# Altium PCB PCB1.PcbDoc
Units mm, origin at the board's own origin, x right, y up, seen from the top; angles counter-clockwise.
Board outline 58 x 58 mm, 2 copper layers (Top Layer, Bottom Layer); 14 components, 9 nets, 30 pads, 0 vias.
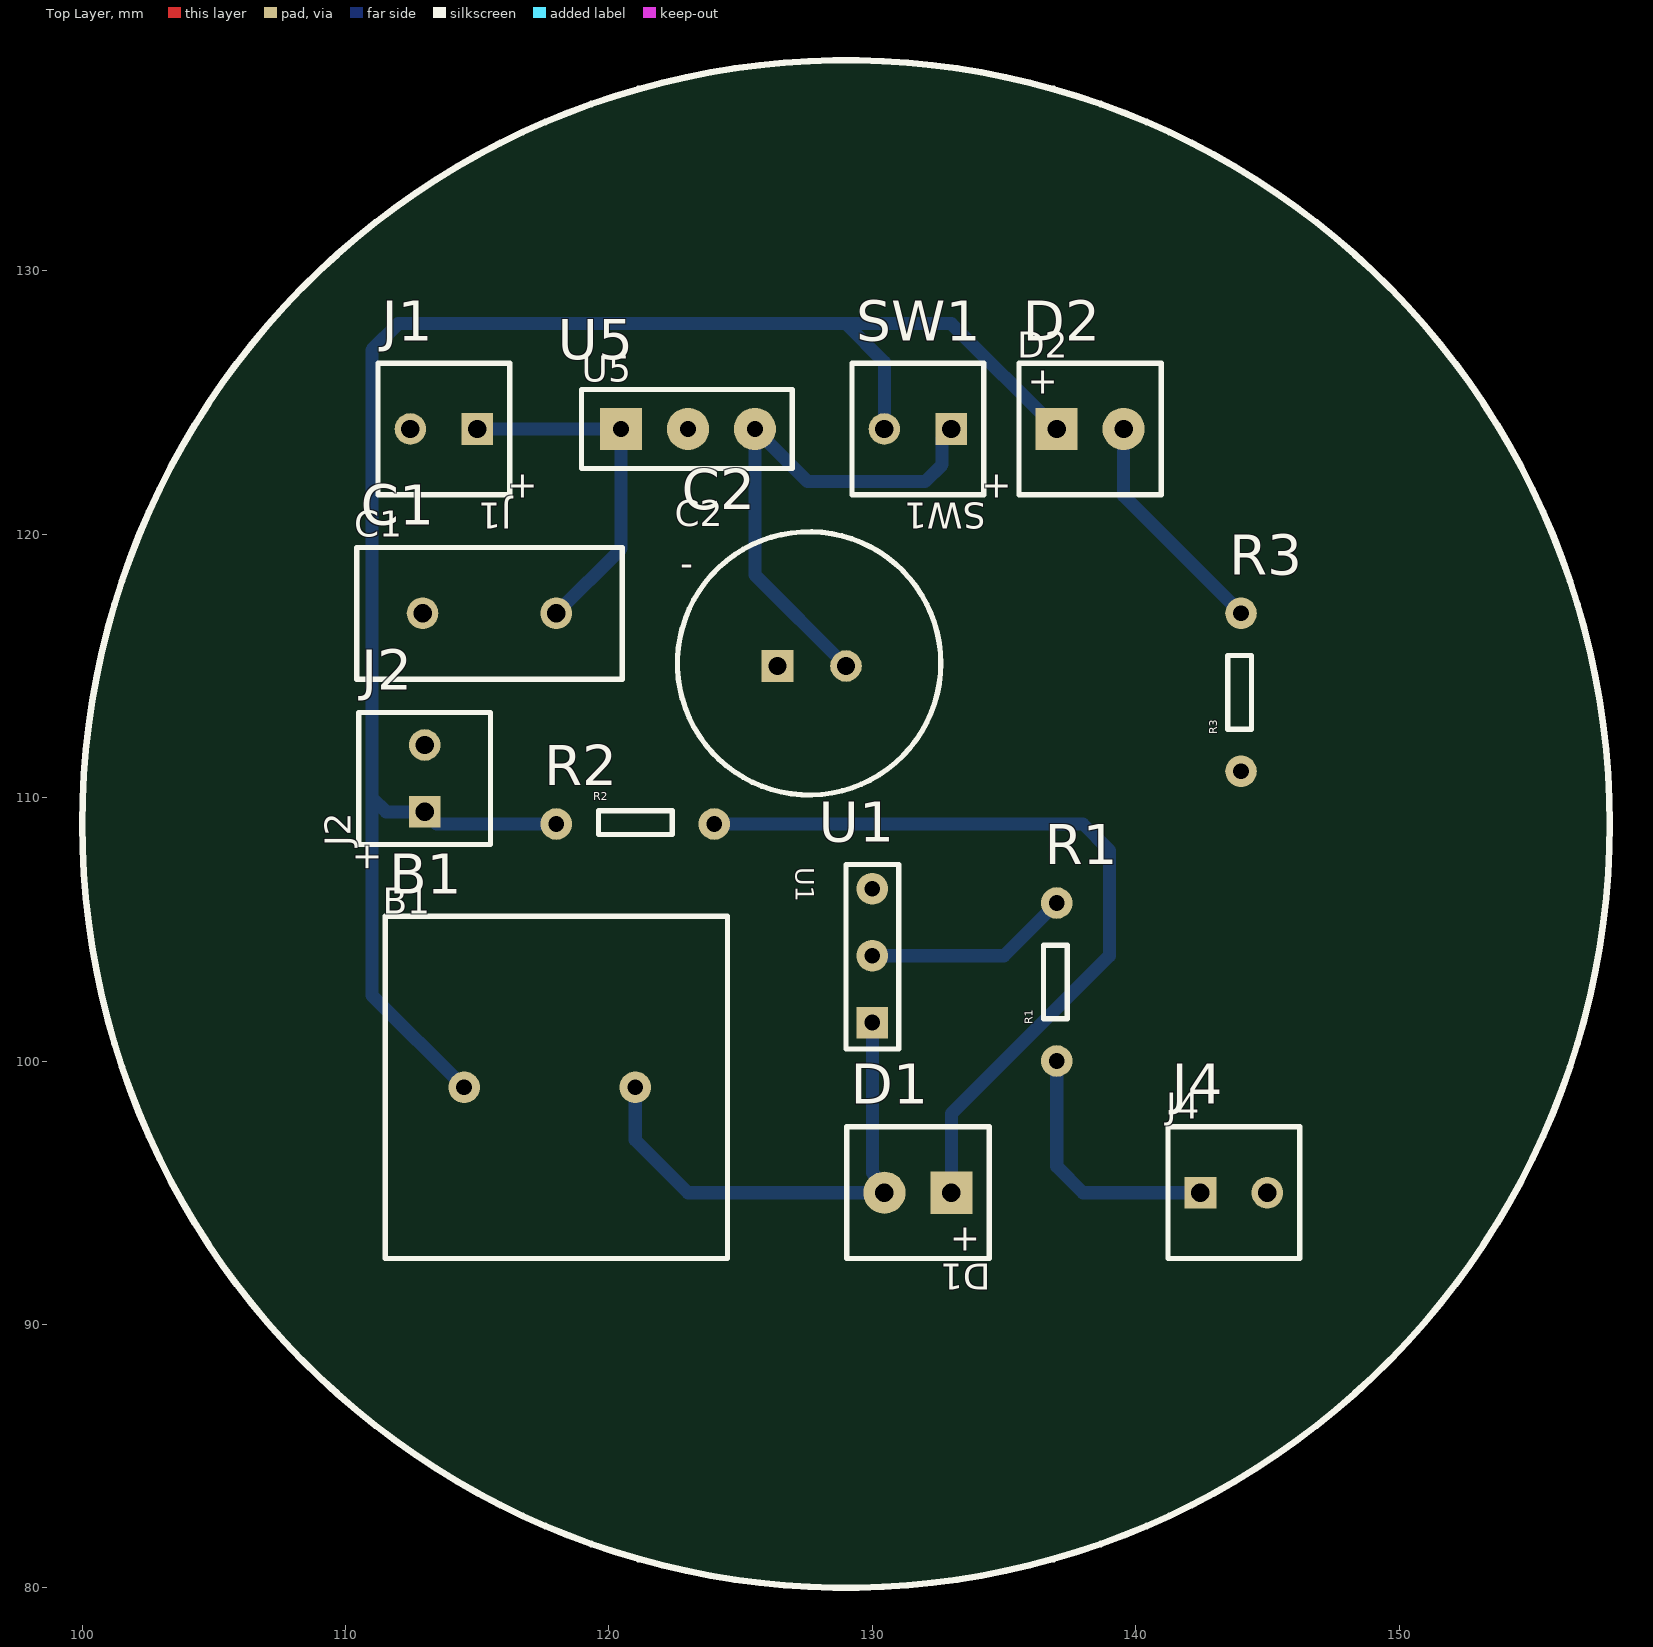
[diagram p0: Top Layer view]
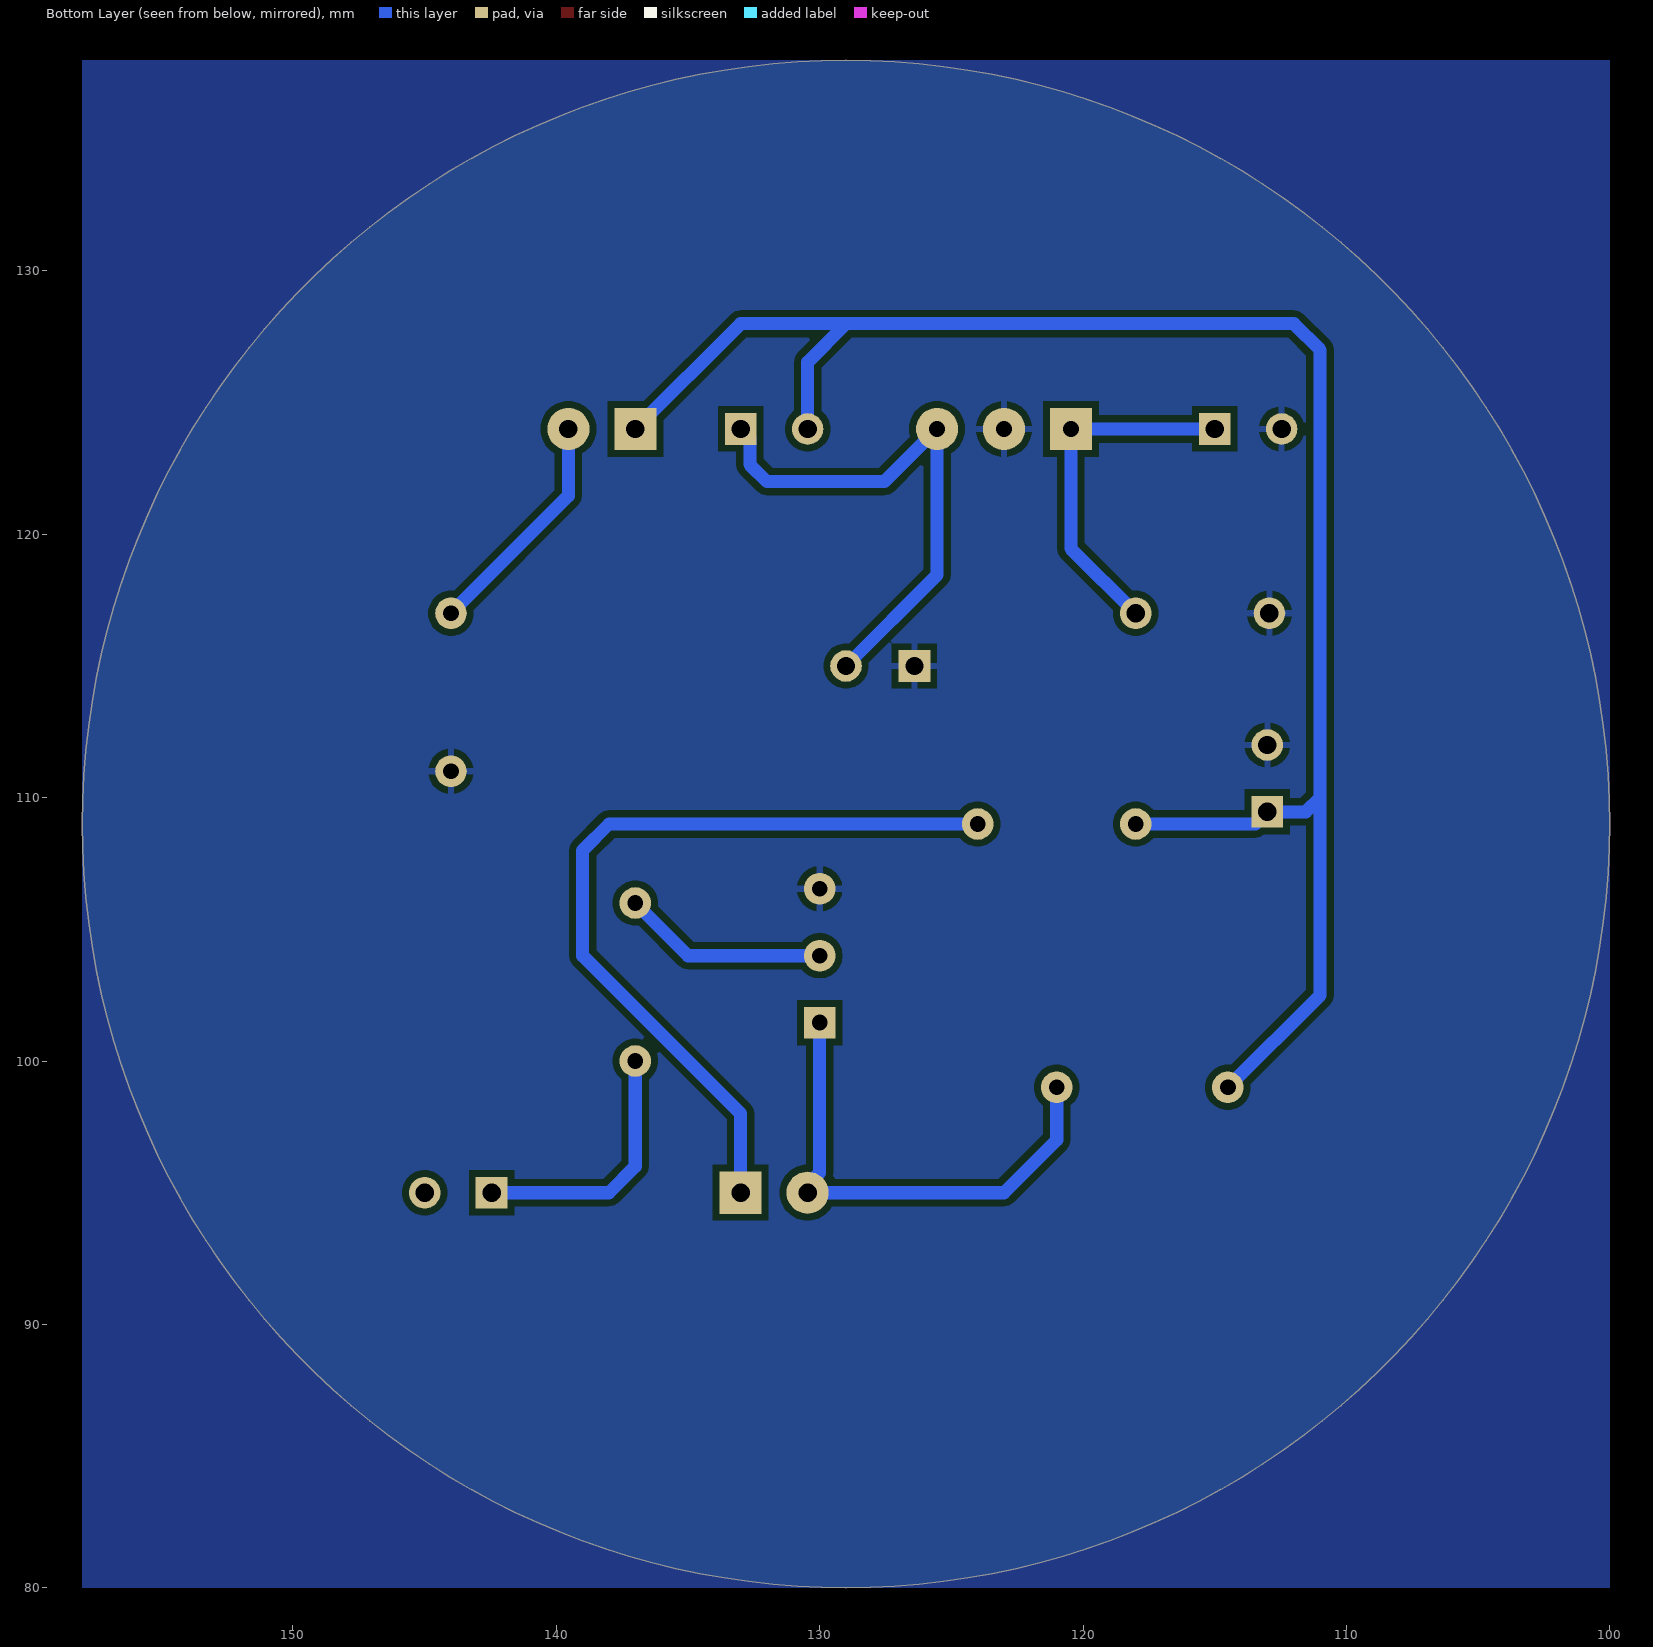
[diagram p1: Bottom Layer view, seen from below]
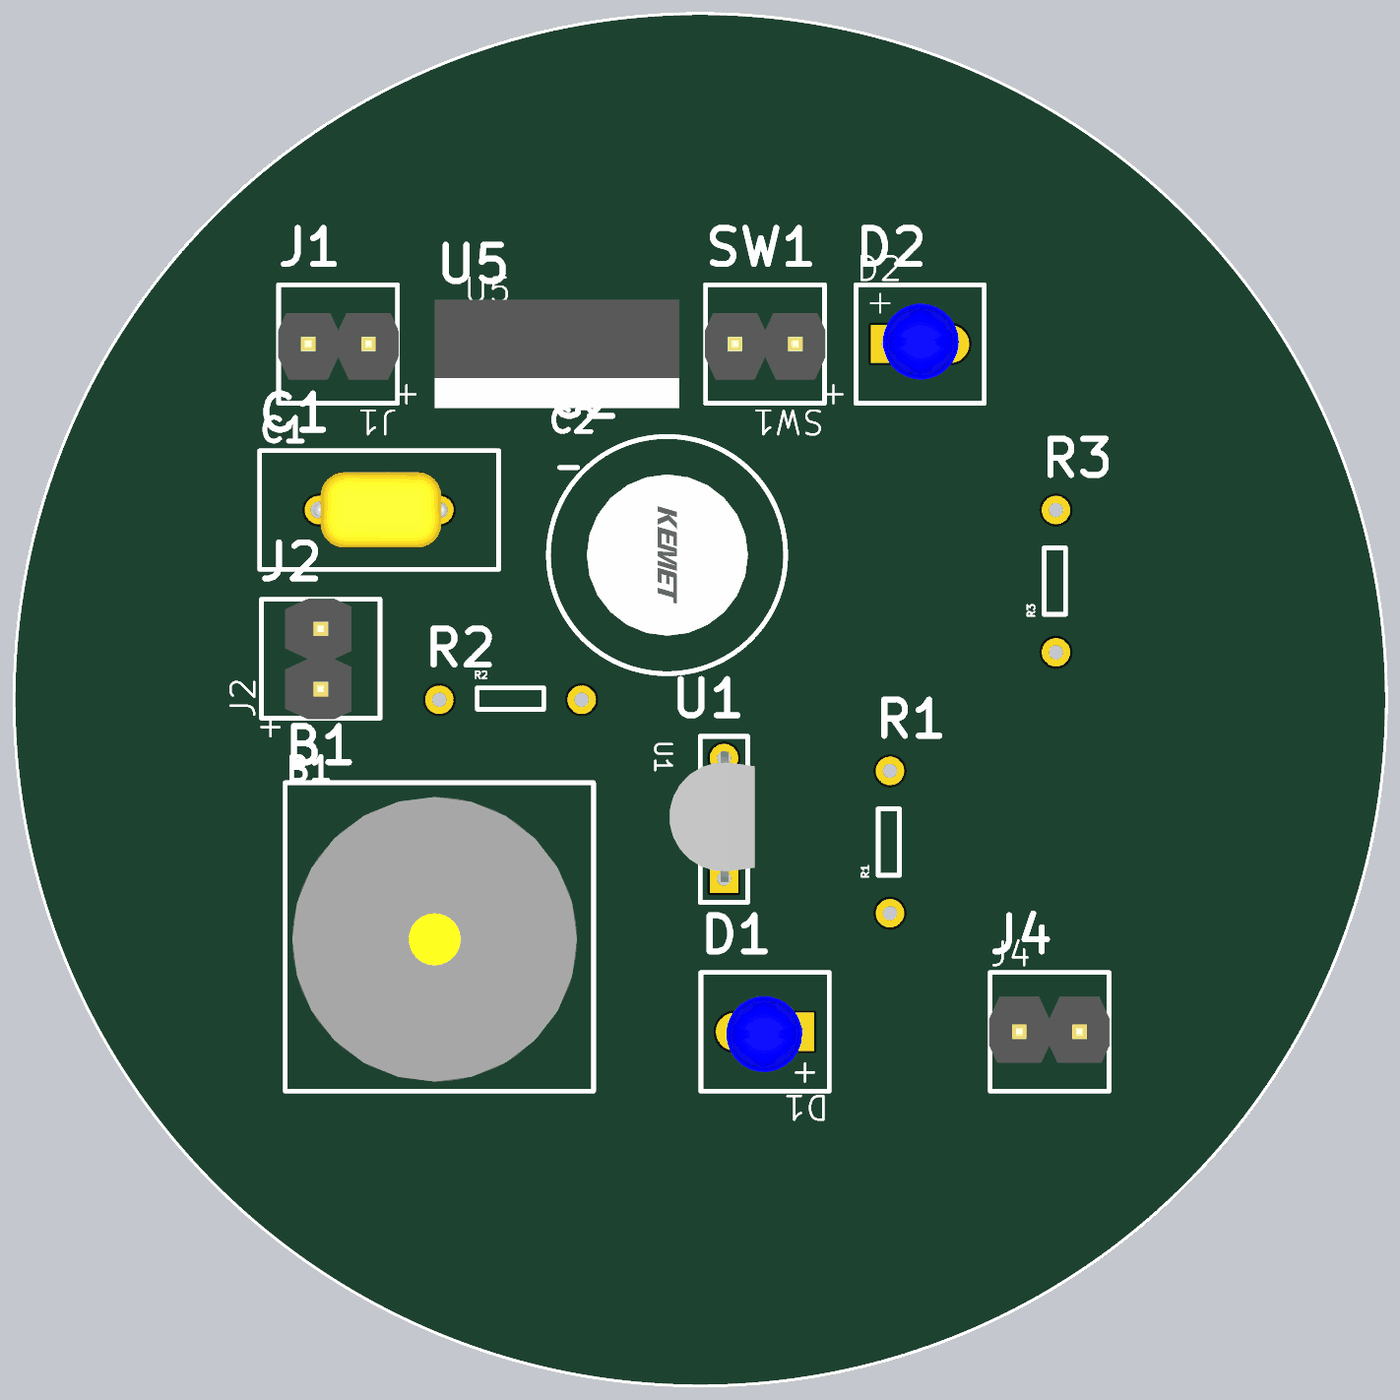
[diagram p2: 3D render of the assembled board from above, using the file's embedded part models]

## Layer stack, top to bottom
Top Solder: solder mask 0.0102, Solder Resist, Dk 3.5
Top Layer: signal copper 0.0356
Dielectric 1: dielectric 0.32, FR-4, Dk 4.8
Bottom Layer: signal copper 0.0356
Bottom Solder: solder mask 0.0102, Solder Resist, Dk 3.5

## Board outline
100,109 ccw(c129,109) 129,80 ccw(c129,109) 158,109 ccw(c129,109) 129,138 ccw(c129,109)

## Design rules (kind name [scope] priority, off if disabled: settings)
Clearance [All] p1: gap=0.254 ignorepadtopadclearanceinfootprint=FALSE except(0: Arc-Hole Track-Hole SMDPad-Hole THPad-Hole Via-Hole Fill-Hole Poly-Hole Region-Hole Text-Hole)
PolygonConnect [All] p1: connectstyle=Relief reliefconductorwidth=0.254 reliefentries=4 polygonreliefangle="90 Angle" airgapwidth=0.254
RoutingVias [All] p1: holewidth=0.711 width=1.27 viastyle="Through Hole" minholewidth=0.711 minwidth=1.27 maxholewidth=0.711 maxwidth=1.27
SolderMaskExpansion [All] p1: expansion=0.102 istentingtop=FALSE
Width [All] p1: maxlimit=0.5 minlimit=0.5 preferedwidth=0.5
30 further rules are at their usual default settings.

## Components (designator, comment, footprint, x,y, rotation, side; value= is the part's Value field where it differs from the comment)
B1 "Buzzer" BUZZER 114.5,99 r0 top
C1 "100nF" "CERAMIC CAP" 112.92,117 r0 top
C2 "2.2uF" "Electrolytic capacitor 2mm" 126.4,115 r0 top
D1 "0805 LED" 3mm_LED 133,95 r180 top
D2 "0805 LED" 3mm_LED 137,124 r0 top
J1 "PWR_CONNECTOR" BATT 115,124 r180 top
J2 "PWR_CONNECTOR" BATT 113,109.46 r90 top
J4 "2x1_CONN" CONN2x1_2.54mm 142.46,95 r0 top
R1 "330R" "THT RESISTOR" 137,100 r90 top
R2 "330R" "THT RESISTOR" 118,109 r0 top
R3 "330R" "THT RESISTOR" 144,111 r90 top
SW1 "PWR_SW" PWR-SW 133,124 r180 top
U1 "NPN Transistor" 2N2222A 130,101.46 r180 top
U5 "3V3_REG" LF33CV 120.46,124 r90 top

## Footprints (in the part's own frame and the unit in brackets; to place one, negate y for a bottom-side part, rotate by r counter-clockwise, add the part's x,y. Pads: shape width x height; smd on the part's side, far side on the other; paste and mask are expansions set on the pad)
2N2222A [mm]
  rect 1.2x1.2 hole 0.6: 1(0,0)
  round 1.2 hole 0.6: 2(0,-2.54) 3(0,-5.08)
  silkscreen extent -1,-6 1,1, body extent -1.3,-5.34 2.3,0.14, height 17.11
3mm_LED [mm]
  rect 1.6x1.6 hole 0.7: 1(0,0)
  round 1.6 hole 0.7: 2(2.54,0)
  silkscreen extent -1.43,-2.5 3.97,2.5, body extent -0.3,-1.5 2.9,1.7, height 5.81
BATT [mm]
  rect 1.2x1.2 hole 0.7: 1(0,0)
  round 1.2 hole 0.7: 2(2.54,0)
  silkscreen extent -1.23,-2.5 3.77,2.5, body extent -1.28,-1.3 3.8,1.5, height 8.06
BUZZER [mm]
  round 1.2 hole 0.6: 1(0,0) 2(6.5,0)
  silkscreen extent -3,-6.5 10,6.5, body extent -2.7,-6.1 9.29,5.9, height 8.76
"CERAMIC CAP" [mm]
  round 1.2 hole 0.7: 1(0,0) 2(5.08,0)
  silkscreen extent -2.5,-2.5 7.58,2.5, body extent -0.22,-1.59 5.42,1.6, height 13.63
CONN2x1_2.54mm [mm]
  rect 1.2x1.2 hole 0.7: 1(0,0)
  round 1.2 hole 0.7: 2(2.54,0)
  silkscreen extent -1.23,-2.5 3.77,2.5, body extent -1.28,-1.3 3.8,1.5, height 8.06
"Electrolytic capacitor 2mm" [mm]
  rect 1.2x1.2 hole 0.7: 1(0,0)
  round 1.2 hole 0.7: 2(2.6,0)
  silkscreen extent -3.8,-4.9 6.2,5.1, body extent -2.17,-3.3 4.6,3.5, height 12.52
LF33CV [mm]
  rect 1.6x1.6 hole 0.6: 1(0,0)
  round 1.6 hole 0.6: 2(0,-2.54) 3(0,-5.08)
  silkscreen extent -1.5,-6.5 1.5,1.5, body extent -2.7,-7.65 1.87,2.65, height 22.24
PWR-SW [mm] "Mechanical power switch"
  rect 1.2x1.2 hole 0.7: 1(0,0)
  round 1.2 hole 0.7: 2(2.54,0)
  silkscreen extent -1.23,-2.5 3.77,2.5, body extent -1.28,-1.3 3.8,1.5, height 8.06
"THT RESISTOR" [mm]
  round 1.2 hole 0.6: 1(0,0) 2(6,0)
  silkscreen extent 1.6,-0.4 4.4,0.5

## Part data
B1: library part BUZZER, "Active buzzer"
C1: library part CAP, "Ceramic through-hole capacitor"
C2: library part E_CAP_2.2uF, "Throug-hole 2.2uF"
D1 D2: library part LED, "Through-hole LED"
J1 J2: library part PWR-CONN, "THT Connector"
J4: library part "CONN 2x1", "THT 2x1 2.54mm CONN"
R1 R2 R3: library part Resistor, "Through-hole resistor"
SW1: library part SWITCH, "Mechanical through-hole switch"
U1: library part 2N2222, "Through-hole NPN Transistor"
U5: library part LF33CV, "Through-hole 3.3V regulator"

## Nets (pads, with @x,y where several pads share a name; then routed paths per layer and width w, separated by ;. In a path a pad name is that pad's centre, name@x,y a point inside that pad or via, vN(x,y) a via of type N, cw(c..) or ccw(c..) an arc to the next point about the centre after c; other vN are vias at no path point)
3V3: B1.1 D2.1 J2.1 R2.1 SW1.2 | length 69.5
  Bottom Layer w0.5: B1.1 111,102.5 111,110 ; R2.1 113.46,109 J2.1 111.54,109.46 111,110 ; SW1.2 130.46,126.54 129,128 ; D2.1 133,128 129,128 ; 111,110 111,127 112,128 129,128
32: J4.1 R1.1 | length 9.9
  Bottom Layer w0.5: R1.1 137,96 138,95 J4.1
GND: C1.1 C2.1 J1.2 J2.2 R3.1 U1.3 U5.2 | length 0.3
  Bottom Layer w0.5: J1.2@112.46,123.811 J1.2 ; C1.1 C1.1@112.96,116.96 ; J2.2@112.96,112.04 J2.2
NetB1_2: B1.2 D1.2 U1.1 | length 18.9
  Bottom Layer w0.5: B1.2 121,97 123,95 D1.2 130.46,95.298 130,95.758 U1.1
NetC1_2: C1.2 J1.1 U5.1 | length 13.7
  Bottom Layer w0.5: J1.1 U5.1 120.46,119.46 C1.2 C1.2@118,117.189
NetC2_2: C2.2 SW1.1 U5.3 | length 20.1
  Bottom Layer w0.5: C2.2 125.54,118.46 U5.3 127.54,122 132,122 132.65,122.65 132.65,123.65 SW1.1
NetD1_1: D1.1 R2.2 | length 30.9
  Bottom Layer w0.5: R2.2 138,109 139,108 139,104 133,98 D1.1
NetD2_2: D2.2 R3.2 | length 8.8
  Bottom Layer w0.5: D2.2 139.54,121.46 R3.2
NetR1_2: R1.2 U1.2 | length 7.8
  Bottom Layer w0.5: U1.2 135,104 R1.2
pads on no net: J4.2

## Polygon pours and split planes (outlines as drawn)
GND on Bottom Layer "GND_L02_P000" (solid, pour order 0): 100,138 158,138 158,80 100,80

## Silkscreen, mask and mechanical layers (free items; w line width, h text height)
Top Overlay:
  circle w0.254: c129,109 r29

## Text inside footprints (layer, text, board x,y; h text height)
C2: Top Overlay "-" at 122.7,118.4 h1
D1: Top Overlay "+" at 134.1,93.667 h1 r180
D2: Top Overlay "+" at 135.9,125.333 h1
J1: Top Overlay "+" at 117.3,122.267 h1 r180
J2: Top Overlay "+" at 111.267,107.16 h1 r90
SW1: Top Overlay "+" at 135.3,122.267 h1 r180